# Allegro board MainBoard.brd
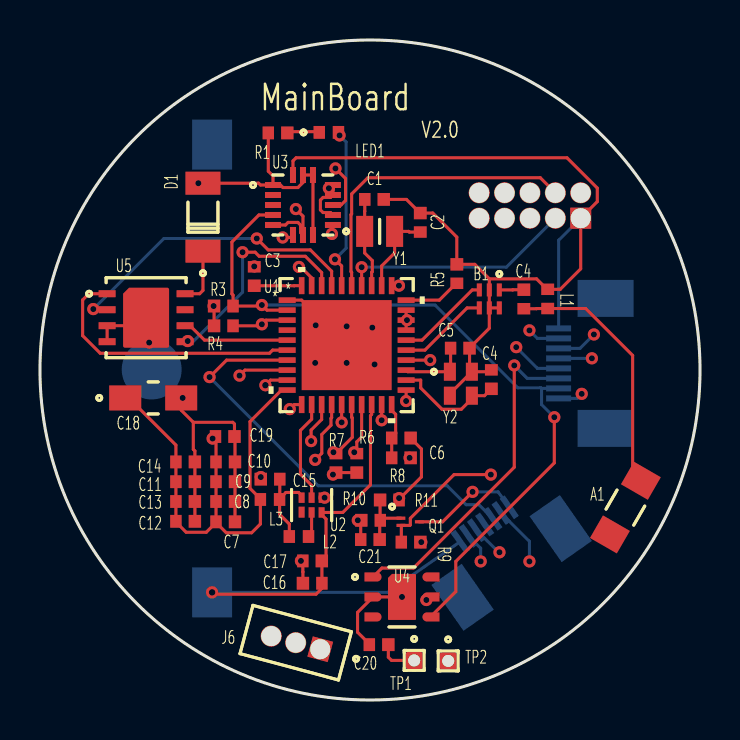
[diagram p0: board, top side]
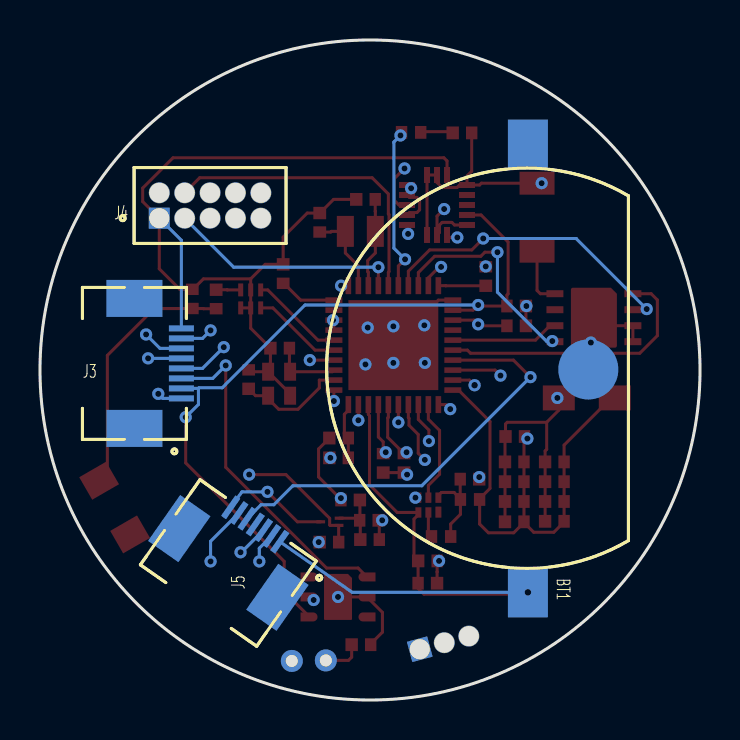
[diagram p1: board, bottom side, seen from below]

Outline 33.02 x 33.02 mm; copper layers: TOP, GND, SIGNAL1, SIGNAL2, POWER, BOTTOM. Coordinates in mm from the lower left corner of the outline.
Outline path: circle c16.51,16.51 r16.51

## Placement (name value [footprint] x y rotation side)
A1  AN_SMD  [ANSMD3216]  29.29 9.63 240 top
B1  Balun_LFB182G45BG2D280  [LFB182G45BG2D280]  22.48 20.07 270 top
BT1  -  [CR2032]  8.61 16.59 270 bottom
C1  22pF  [C0402]  16.74 25.04 0 top
C2  22pF  [C0402]  19.02 23.9 90 top
C3  1uF  [C0402]  10.72 21.18 270 top
C4  12pF  [C0402]  22.58 16.03 270 top
C4_GRM1555C1H1R2CZ01D1  1.2pF  [C0402]  24.21 20.07 90 top
C5  12pF  [C0402]  21.03 17.6 0 top
C6  1nF  [C0402]  18.08 13.11 0 top
C7  100nF  [C0402]  9.3 8.92 0 top
C8  100nF  [C0402]  9.3 9.93 0 top
C9  100nF  [C0402]  9.3 10.92 0 top
C10  100nF  [C0402]  9.3 11.91 0 top
C11  200pF  [C0402]  7.29 10.92 0 top
C12  2.2uF  [C0402]  7.29 8.94 0 top
C13  1uF  [C0402]  7.29 9.93 0 top
C14  100nF  [C0402]  7.29 11.91 0 top
C15  2.2uF  [C0402]  11.51 11.05 180 top
C16  1210  [C0402]  13.61 5.84 180 top
C17  2.2uF  [C0402]  13.64 6.96 0 top
C18  CAP POL  [3216-18]  5.66 15.11 0 top
C19  CAP NP  [C0402]  9.27 13.18 0 top
C20  10NF_25V_GRM155R71E103KA01D  [C0402]  16.97 2.77 0 top
C21  100pF  [C0402]  16.54 8.03 0 top
D1  1N60P_LL34  [LL60]  8.15 24.16 90 top
J3  SkinClosed_Ports  [FPC_8PIN_0_5MM]  28.3 16.84 0 bottom
J4  CC_Debugger  [HEADER_2X5_6]  27.05 24.1 180 bottom
J5  SIM800_Ports  [FPC_7PIN_0_5MM]  23.6 6.86 305 bottom
J6  UART  [HEADER1X3]  14.02 2.54 165 top
L1  ? nH  [L0402]  25.4 20.07 270 top
L2  2.2uH  [L0402]  12.95 8.18 180 top
L3  LBead_BLM15HG102SN1D  [L0402]  11.51 10.03 180 top
LED1  RED  [LED0402]  14.45 28.4 0 top
Q1  MMBT3904SL-SOT-923  [SOT923]  18.52 8.92 0 top
R1  330R  [R0402]  11.91 28.37 0 top
R3  2K2  [R0402]  9.17 19.71 180 top
R4  2K2  [R0402]  9.17 18.72 180 top
R5  56K-1%  [R0402]  20.85 21.34 90 top
R6  4.7K  [R0402]  15.85 11.84 270 top
R7  4.7K  [R0402]  14.81 11.84 270 top
R8  2K7  [R0402]  18.08 12.12 0 top
R9  20K  [R0402]  18.57 7.9 0 top
R10  4.7K  [R0402]  16.54 8.99 180 top
R11  47K  [R0402]  17.48 10.01 180 top
TP1  TP  [TP1]  18.72 1.98 0 top
TP2  TP  [TP1]  20.42 1.96 0 top
U1  CC2541-VQFN  [RHA40_4P5X4P5]  15.34 17.75 0 top
U2  TPS62730  [DRY6]  13.59 9.75 90 top
U3  -  [LIS3DH]  13.16 24.77 0 top
U4  -  [SHT25]  18.11 5.16 0 top
U5  MX25U1635EZUI-10G  [MX25U1635EZUI]  5.31 19.13 0 top
Y1  32.768KHz  [Y_FC_12M]  16.99 23.44 0 top
Y2  32MHz  [FA-118T]  21.06 15.82 0 top

## Library data of the parts
A1 = AN_SMD_1
B1 = Balun_LFB182G45BG2D280
BT1 = BATTERY
C1-C4 C4_GRM1555C1H1R2CZ01D1 C5-C14 C21 = CAP-NP
C15 C17 C19 C20 = CAP NP
C16 = CAP-POL
C18 = CAP POL
D1 = DIODE
J3 = HEADER 8
J4 = CC_Debugger
J5 = HEADER 7
J6 = HEADER 3
L1 L2 = L
L3 = BEAD
LED1 = LED
Q1 = NPN
R1 R3-R11 = R
TP1 TP2 = TP
U1 = CC2541
U2 = TPS62730
U3 = LIS3DH
U4 = SHT25_0
U5 = MX25U1635EZUI-10G_0
Y1 = Crystal_2PIN
Y2 = Crystal_4PIN_US

## Footprints (pads in the part's own frame, mm; a bottom-side part is the same pattern mirrored in y, then rotated)
3216-18
  rect 1.6x1.25 smd: 1(-1.4,0) 2(1.4,0)
ANSMD3216
  rect 1.3x1.55 smd: 1(-1.55,0) 2(1.55,0)
C0402
  rect 0.57x0.64 smd: 1(-0.49,0)
  rect 0.62x0.64 smd: 2(0.46,0)
CR2032
  rect 2.5x2 smd: (-11.2,0) 1(11.2,0)
  round 3 smd: 2(0.051,3.023)
DRY6
  rect 0.55x0.3 smd: 1(-0.355,0.5)
  rect 0.52x0.3 smd: 2(-0.37,0) 3(-0.37,-0.5) 4(0.37,-0.5) 5(0.37,0) 6(0.37,0.5)
FA-118T
  rect 0.6x0.9 smd: 1(-0.55,0.6) 2(-0.55,-0.6) 3(0.55,-0.6) 4(0.55,0.6)
FPC_7PIN_0_5MM
  rect 2.8x1.85 smd: (0,2.997) (0,-2.997)
  rect 1.25x0.3 smd: 1(-2.35,1.5) 2(-2.35,1) 3(-2.35,0.5) 4(-2.35,0) 5(-2.35,-0.5) 6(-2.35,-1) 7(-2.35,-1.5)
FPC_8PIN_0_5MM
  rect 2.8x1.85 smd: (0,-3.251) (0,3.251)
  rect 1.25x0.3 smd: 1(-2.35,1.75) 2(-2.35,1.25) 3(-2.35,0.75) 4(-2.35,0.25) 5(-2.35,-0.25) 6(-2.35,-0.75) 7(-2.35,-1.25) 8(-2.35,-1.75)
HEADER1X3
  rect 1.05x1.05 hole 1: 1(0,0)
  round 1.05 hole 1: 2(1.27,0) 3(2.54,0)
HEADER_2X5_6
  rect 1.05x1.05 hole 1: 1(0,0)
  round 1.05 hole 1: 2(0,1.27) 3(1.27,0) 4(1.27,1.27) 5(2.54,0) 6(2.54,1.27) 7(3.81,0) 8(3.81,1.27) 9(5.08,0) 10(5.08,1.27)
L0402
  rect 0.57x0.64 smd: 1(-0.48,0) 2(0.48,0)
LED0402
  rect 0.57x0.64 smd: 1(-0.48,0) 2(0.48,0)
LFB182G45BG2D280
  rect 0.65x0.25 smd: 1(-0.45,0.5) 2(-0.45,0) 3(-0.45,-0.5) 4(0.45,-0.5) 5(0.45,0) 6(0.45,0.5)
LIS3DH
  rect 0.8x0.3 smd: 1(-1.5,1) 2(-1.5,0.5) 3(-1.5,0) 4(-1.5,-0.5) 5(-1.5,-1) 9(1.5,-1) 10(1.5,-0.5) 11(1.5,0) 12(1.5,0.5) 13(1.5,1)
  rect 0.3x0.8 smd: 6(-0.5,-1.5) 7(0,-1.5) 8(0.5,-1.5) 14(0.5,1.5) 15(0,1.5) 16(-0.5,1.5)
LL60
  rect 1.15x1.75 smd: 1(1.7,0) 2(-1.7,0)
MX25U1635EZUI
  rect 0.85x0.35 smd: 1(-1.95,1.2) 2(-1.95,0.4) 3(-1.95,-0.4) 4(-1.95,-1.2) 5(1.95,-1.2) 6(1.95,-0.4) 7(1.95,0.4) 8(1.95,1.2)
  custom 2.3x3 smd: 9(0,0)
R0402
  rect 0.57x0.64 smd: 1(-0.49,0)
  rect 0.62x0.64 smd: 2(0.46,0)
RHA40_4P5X4P5
  rect 0.85x0.28 smd: 1(-2.975,2.25) 2(-2.975,1.75) 3(-2.975,1.25) 4(-2.975,0.75) 5(-2.975,0.25) 6(-2.975,-0.25) 7(-2.975,-0.75) 8(-2.975,-1.25) 9(-2.975,-1.75) 10(-2.975,-2.25) 21(2.975,-2.25) 22(2.975,-1.75) 23(2.975,-1.25) 24(2.975,-0.75) 25(2.975,-0.25) 26(2.975,0.25) 27(2.975,0.75) 28(2.975,1.25) 29(2.975,1.75) 30(2.975,2.25)
  rect 0.28x0.85 smd: 11(-2.25,-2.975) 12(-1.751,-2.975) 13(-1.25,-2.975) 14(-0.75,-2.975) 15(-0.25,-2.975) 16(0.25,-2.975) 17(0.75,-2.975) 18(1.25,-2.975) 19(1.751,-2.975) 20(2.25,-2.975) 31(2.25,2.975) 32(1.751,2.975) 33(1.25,2.975) 34(0.75,2.975) 35(0.25,2.975) 36(-0.25,2.975) 37(-0.75,2.975) 38(-1.25,2.975) 39(-1.751,2.975) 40(-2.25,2.975)
  rect 4.5x4.5 smd: 41(0,0)
SHT25
  custom 0.85x0.45 smd: 1(-1.45,1) 2(-1.45,0) 3(-1.45,-1) 4(1.45,-1) 5(1.45,0) 6(1.45,1)
  custom 1.4x2.3 smd: 7(0,0)
SOT923
  rect 0.44x0.16 smd: 1(0.46,0) 2(-0.46,0.18) 3(-0.46,-0.18)
TP1
  round 1.1 hole 0.6: 1(0,0)
Y_FC_12M
  rect 0.85x1.55 smd: 1(-0.75,0) 2(0.75,0)

## Nets
DGND: B1.2 B1.5 B1.6 BT1.2(-) C1.2 C2.2 C3.1 C4.1 C5.2 C6.2 C7.2 C8.2 C9.2 C10.2 C11.2 C12.2 C13.2 C14.2 C15.2 C16.2 C17.1 C18.2 C19.2 C20.1 J3.8 J4.1(GND) J5.7 J6.3 L1.1 Q1.1(EMITTER) R5.2 R11.1 TP2.1 U1.1(GND#1) U1.41(GND#41) U2.4(GND) U3.5(GND#5) U3.7(SDO/SA0) U3.10(RES) U3.12(GND#12) U3.13(ADC3) U3.16(ADC1) U4.2(GND) U4.7(DGND) U5.3(/WP) U5.4(GND) U5.9(DGND) Y2.2 Y2.4
BAT_ADC: BT1.1(+) C16.1 C17.2 J5.1 U1.18(P0_1) U2.3(VIN)
BPI_BUS: J5.6 U1.14(P0_5)
CC2541_RF_N: B1.3 U1.26(RF_N)
CC2541_RF_P: B1.4 U1.25(RF_P)
CC2541_SCL: J3.2 R3.1 U1.2(SCL) U3.4(SCL/SPE) U4.4(SCL)
CC2541_SDA: J3.3 R4.1 U1.3(SDA) U3.6(SDA) U4.1(SDA)
DC: J4.3(DC) U1.34(P2_2/DC)
DC_P0_7: U1.12(P0_7) U2.5(BYP)
DD: J4.4(DD) U1.35(P2_1/DD)
LIS3DH_INT1: U1.9(P1_1) U3.11(INT1)
LIS3DH_INT2: U1.8(P1_2) U3.9(INT2)
LTC_CS: J5.5 U1.7(P1_3)
MCP_EN: C21.1 R10.2 U1.15(P0_4)
MISO: U1.37(P1_7) U5.2(SO)
MOSI: U1.38(P1_6) U5.5(SI)
NRST: J4.7(NRST) R8.2
P0_0/AD0: J3.4 U1.19(P0_0)
P0_2/AD2: J5.3 J6.1 R6.1 U1.17(P0_2)
P0_3/AD3: J5.2 J6.2 R7.1 U1.16(P0_3)
P0_6/AD6: J3.7 U1.13(P0_6)
P1_0: J3.6 U1.11(P1_0)
P2_0: LED1.2(CATHODE) U1.36(P2_0)
REG_VDD: C7.1 C8.1 C9.1 C10.1 C11.1 C12.1 C13.1 C14.1 C18.1 C19.1 C20.2 D1.1(A) J3.1 J4.2(VCC) L3.2 R1.1 R3.2 R4.2 R6.2 R7.2 R9.2 TP1.1 U1.10(DVDD2) U1.21(AVDD5) U1.24(AVDD3) U1.27(AVDD2) U1.28(AVDD1) U1.29(AVDD4) U1.31(AVDD6) U1.39(DVDD1) U3.1(VDD_IO) U3.8(CS) U3.14(VDD) U3.15(ADC2) U4.5(VDD)
SCK: U1.5(P1_5) U5.6(SCLK)
SIM800_PK: J5.4
SSN: U1.6(P1_4) U5.1(/CS)
VMCP: J3.5 Q1.3(COLLECTOR) R9.1
N12835: C1.1 U1.33(P2_3/OSC32K_Q2) Y1.1
N12841: C2.1 U1.32(P2_4/OSC32K_Q1) Y1.2
N13149: R5.1 U1.30(RBIAS)
N13333: C3.2 U1.40(DCOUPL)
N14357: C5.1 U1.23(XOSC_Q2) Y2.1
N14367: C4.2 U1.22(XOSC_Q1) Y2.3
N19377: C6.1 R8.1 U1.20(RST_N)
N42338: B1.1 C4_GRM1555C1H1R2CZ01D1.2
N42343: A1.1(ANT) C4_GRM1555C1H1R2CZ01D1.1 L1.2
N157847: C15.1 L2.2 L3.1 U2.6(VOUT)
N158007: L2.1 U2.2(SW)
N177102: C21.2 Q1.2(BASE) R10.1 R11.2
N187935: D1.2(K) U5.8(VCC)
N188720: LED1.1(ANODE) R1.2

Pads without a net: A1 2; J4 5 6 8 9 10; U1 4; U2 1; U3 2 3; U4 3 6; U5 7

## Via types
v1: diameter 0.61, hole 0.305, TOP to BOTTOM, 62 vias
v2: diameter 0.61, hole 0.33, TOP to BOTTOM, 2 vias

## Routing (per net, layer and track width the routed paths; a pad name or vN(x,y) marks a point on that pad's centre or on a via; arc(x,y) is an arc through that point)
DGND: length 108.1
  TOP w0.152: B1.5 22.48,18.6 21.49,17.61 C5.2 21.49,16.54 Y2.4 ; B1.5 B1.2 22.48,21.07 ; B1.5 B1.6 ; 17.97,10.04 19.08,11.16 19.08,12.56 18.54,13.1 C6.2 ; 17.97,10.04 v1(17.97,10.1) ; 17.97,10.04 R11.1 ; 14.66,17.75 v1(13.77,16.87) ; 14.66,17.75 14.66,17.88 v1(13.79,18.75) ; 14.66,17.75 U1.41 ; U3.10 14.54,24.39 14.16,24.39 14.03,24.52 14.03,25.01 14.16,25.14 14.54,25.14 U3.12 U3.13 14.61,25.76 v1(14.45,25.6) ; C12.2 C13.2 C11.2 C14.2 7.75,12.46 7.67,12.54 7.67,13.89 ; v1(18.11,5.16) U4.2 15.89,4.38 15.89,3.39 16.48,2.8 C20.1 ; U1.41 15.85,17.75 ; U1.41 13.09,20 U1.1 ; U1.41 v1(15.34,18.69) ; U1.41 v1(15.34,16.87) ; 15.85,17.75 15.85,17.68 v1(16.74,16.79) ; 15.85,17.75 15.85,17.86 v1(16.62,18.63) ; 22.48,21.07 24.84,21.07 25.36,20.55 L1.1 26.02,20.55 27.05,21.57 J4.1 27.88,24.93 27.88,25.61 26.36,27.13 12.81,27.13 12.66,26.97 U3.16 ; 22.48,21.07 21.75,21.8 R5.2 20.85,23.16 19.65,24.36 C2.2 19.01,24.36 18.33,25.04 C1.2 ; v1(7.14,15.11) C18.2 7.06,14.5 7.67,13.89 ; Y2.2 20.51,15.32 Y2.4 ; U2.4 v1(14.24,10.12) ; U5.4 U5.3 4.91,18.73 U5.9 5.89,18.54 5.89,18.31 v1(5.46,17.88) ; 7.67,13.89 9.64,13.89 9.73,13.81 C19.2 9.76,13.16 C10.2 C9.2 C8.2 C7.2 ; Q1.1 20.14,8.92 v1(21.64,10.41) ; v1(12.8,24.56) 13.16,24.21 U3.7 13.04,23.39 13.04,23.76 12.9,23.89 12.41,23.89 12.28,23.77 U3.5 ; C4.1 22.49,16.42 Y2.4 ; v1(13.06,6.96) C17.1 13.15,6.41 13.15,6.41 C16.2 ; C3.1 v1(10.72,21.69) ; C15.2 v1(11.05,11.15)
  GND w0.152: 19.67,1.96 TP2.1 ; TP2.1 20.42,1.2 ; TP2.1 21.18,1.96 ; TP2.1 20.42,2.71 ; 10.79,3.2 J6.3 ; J6.3 11.57,3.98 ; J6.3 11.57,2.42 ; 27.83,24.1 J4.1 27.05,23.33
  BOTTOM w0.152: v1(21.64,10.41) 22.92,10.41 J5.7 ; BT1.2 5.46,16.66 v1(5.46,17.88) ; J4.1 25.95,23 J3.8
BAT_ADC: length 29.9
  TOP w0.152: v2(8.61,5.39) 8.7,5.29 13.81,5.29 14.1,5.59 C16.1 14.1,6.96 C17.2 14.1,6.97 14.31,7.18 14.31,9.05 14.09,9.27 U2.3 15.15,9.38 16.53,10.77 16.53,14.23 16.59,14.29 U1.18
  BOTTOM w0.152: v2(8.61,5.39) 17.4,5.39 J5.1
BPI_BUS: length 20.7
  TOP w0.152: v1(13.77,12.01) 14.1,12.34 14.1,13.28 14.56,13.75 14.56,14.09 14.59,14.13 U1.14
  SIGNAL2 w0.152: v1(24.49,6.93) 23.95,6.4 17.21,6.4 13.71,9.9 13.71,11.95 v1(13.77,12.01)
  BOTTOM w0.152: J5.6 24.49,7.94 v1(24.49,6.93)
CC2541_RF_N: length 4.7
  TOP w0.152: B1.3 21.63,20.52 19.11,18 U1.26
CC2541_RF_P: length 4.5
  TOP w0.152: B1.4 21.37,19.62 19.26,17.5 U1.25
CC2541_SCL: length 39.5
  TOP w0.152: v1(25.73,14.15) 25.73,11.86 20.8,6.93 20.8,5.43 19.56,4.18 U4.4 ; U1.2 11.36,19.5 v1(11.1,19.76) 11.05,19.71 R3.1 9.66,20.26 9.6,20.32 9.6,22.91 10.95,24.26 U3.4
  BOTTOM w0.152: 25.09,15.59 25.09,14.79 v1(25.73,14.15) ; 25.09,15.59 25.06,15.62 23.9,15.62 19.76,19.76 v1(11.1,19.76) ; 25.09,15.59 J3.2
CC2541_SDA: length 38.6
  TOP w0.152: U1.3 11.31,19 v1(11.1,18.8) 11.02,18.72 R4.1 ; v1(23.73,16.74) 23.73,11.65 18.68,6.6 17.11,6.6 U4.1 ; U3.6 12.53,23.14 v1(12.14,23.14)
  SIGNAL1 w0.152: v1(12.14,23.14) 12.14,19.84 v1(11.1,18.8) 12.34,17.55 22.91,17.55 v1(23.73,16.74)
  BOTTOM w0.152: v1(23.73,16.74) 24.38,16.09 J3.3
DC: length 11.6
  TOP w0.152: U1.34 v1(16.09,21.65)
  BOTTOM w0.152: J4.3 23.33,21.65 v1(16.09,21.65)
DC_P0_7: length 5.1
  TOP w0.152: U1.12 13.59,14.05 13.03,13.49 13.03,11.29 13.59,10.74 U2.5
DD: length 15.5
  TOP w0.152: J4.4 25.03,26.13 16.4,26.13 15.59,25.32 15.59,24.32 15.56,24.28 15.56,21.43 15.59,21.4 U1.35
LIS3DH_INT1: length 16.4
  TOP w0.152: U1.9 11.53,16 v2(11.28,15.75) ; U3.11 15.06,24.77 15.29,24.99 15.29,26.09 v1(14.78,26.59)
  SIGNAL2 w0.152: v2(11.28,15.75) 11.28,17.81 15.29,21.82 15.29,26.09 v1(14.78,26.59)
LIS3DH_INT2: length 12.4
  TOP w0.152: U3.9 14.61,23.71 v1(14.61,23.32) ; U1.8 10.26,16.5 v1(9.98,16.23)
  SIGNAL2 w0.152: v1(14.61,23.32) 13.85,23.32 9.98,19.45 v1(9.98,16.23)
LTC_CS: length 21.3
  TOP w0.152: U1.7 9.33,17 v1(8.48,16.15)
  BOTTOM w0.152: J5.5 21.96,9.77 21.32,9.77 20.37,10.72 13.92,10.72 v1(8.48,16.15)
MCP_EN: length 7.4
  TOP w0.152: C21.1 16.05,8.96 R10.2 ; U1.15 v1(15.09,13.89)
  SIGNAL1 w0.152: v1(15.09,13.89) 16.26,12.73 16.26,9.35 v1(15.9,8.99)
MISO: length 15.5
  TOP w0.152: U1.37 14.59,21.45 13.53,22.52 11.42,22.52 v1(10.85,23.09) ; U5.2 3.33,19.56 v1(2.67,19.56)
  BOTTOM w0.152: v1(10.85,23.09) 6.2,23.09 v1(2.67,19.56)
MOSI: length 10.8
  TOP w0.152: U1.38 14.09,21.38 13.28,22.2 10.97,22.2 10.76,22.4 v1(10.13,22.4)
  BOTTOM w0.152: v1(7.39,17.96) 7.69,17.96 10.13,20.4 v1(10.13,22.4)
NRST: length 16.3
  TOP w0.152: R8.2 v1(18.49,12.12)
  SIGNAL2 w0.152: J4.7 25.02,22.33 25.02,17.28 19.86,12.12 v1(18.49,12.12)
P0_0/AD0: length 11.6
  TOP w0.152: U1.19 v1(17.09,14)
  SIGNAL2 w0.152: v1(17.09,14) 20.17,14 v1(23.83,17.65)
  BOTTOM w0.152: J3.4 24.89,16.59 v1(23.83,17.65)
P0_2/AD2: length 24.8
  TOP w0.152: U1.17 16.09,13.16 15.85,12.92 R6.1 15.79,12.33 v1(15.72,12.4)
  SIGNAL1 w0.152: J6.1 14.5,3.02 18.89,3.02 22.99,7.12 v1(22.99,7.39)
  SIGNAL2 w0.152: v1(15.72,12.4) 16.89,11.23 19.15,11.23 v1(22.99,7.39)
  BOTTOM w0.152: 21.84,8.5 22.94,7.39 v1(22.99,7.39)
P0_3/AD3: length 25.1
  TOP w0.152: U1.16 15.59,14.14 15.62,14.11 15.62,13.14 R7.1 14.75,12.33 v1(14.68,12.4)
  SIGNAL1 w0.152: J6.2 16.86,6.93 v1(22.05,6.93)
  SIGNAL2 w0.152: v1(14.68,12.4) 17.83,9.25 19.74,9.25 v1(22.05,6.93)
  BOTTOM w0.152: v1(22.05,6.93) 22.05,7.59 J5.2
P0_6/AD6: length 17
  TOP w0.152: U1.13 14.09,14.03 13.56,13.51 v1(13.56,12.95)
  SIGNAL2 w0.152: v1(24.49,18.49) 20.25,18.49 18.99,17.23 18.99,17.03 14.91,12.95 v1(13.56,12.95)
  BOTTOM w0.152: v1(24.49,18.49) 24.89,18.09 J3.7
P1_0: length 19.5
  TOP w0.152: v1(12.5,14.55) 12.72,14.78 U1.11
  SIGNAL1 w0.152: v1(12.5,14.55) 13.67,15.72 25.15,15.72 v1(27.71,18.29)
  BOTTOM w0.152: v1(27.71,18.29) 27.01,17.59 J3.6
P2_0: length 8
  TOP w0.152: U1.36 15.09,21.71 v1(14.76,22.05)
  BOTTOM w0.152: v1(14.76,22.05) 15.32,22.61 15.32,27.91 v1(14.99,28.24)
REG_VDD: length 51.6
  TOP w0.152: v1(8.69,19.71) R3.2 R4.2 ; U1.39 13.59,21.12 13.04,21.67 v1(12.95,21.67) ; C20.2 17.43,2.14 17.59,1.98 TP1.1 ; R6.2 R7.2 14.75,11.38 v1(14.66,11.28) ; v1(7.92,25.86) D1.1 10.94,25.86 11.03,25.76 U3.1 ; U1.28 U1.27 ; U1.28 v1(18.36,19) ; U1.28 U1.29 ; 8.81,8.88 9.32,8.37 10.59,8.37 11.03,8.81 L3.2 11.03,10.07 10.51,10.59 10.51,13.93 12.08,15.5 U1.10 ; 8.81,8.88 C7.1 C8.1 C9.1 C10.1 8.81,13.16 C19.1 8.74,13.18 v1(8.64,13.08) ; 8.81,8.88 8.32,8.39 7.31,8.39 6.8,8.91 C12.1 C13.1 C11.1 C14.1 6.8,12.75 4.44,15.11 C18.1 ; U4.5 19.48,5.16 v1(19.33,5) ; U1.21 v1(18.32,14.96) ; U1.31 v1(17.96,20.73) ; U3.1 12.03,25.76 12.16,25.64 12.9,25.64 13.16,25.89 U3.15 U3.14 U3.8 ; U3.1 11.66,26.22 11.42,26.45 R1.1 ; U1.24 v1(19.52,17) ; R9.2 v1(19.08,7.9)
  POWER w0.152: TP1.1 19.47,1.98 ; TP1.1 17.97,1.98 ; TP1.1 18.72,2.74 ; TP1.1 18.72,1.23 ; 27.83,25.37 J4.2 27.05,26.15
  BOTTOM w0.152: v1(27.1,15.32) 26.88,15.09 J3.1
SCK: length 5.4
  TOP w0.152: U5.6 7.51,18.73 8.23,18 U1.5
SSN: length 13.8
  TOP w0.152: U5.1 2.44,20.33 2.13,20.02 2.13,18.23 3.01,17.35 11.48,17.35 11.64,17.5 U1.6
VMCP: length 16.9
  TOP w0.152: R9.1 18.08,8.71 Q1.3 18.5,8.74 18.53,8.76 18.53,9.09 20.72,11.28 v1(22.56,11.28)
  SIGNAL2 w0.152: v1(27.61,17.09) 27.64,17.07 27.64,15.1 23.82,11.28 v1(22.56,11.28)
  BOTTOM w0.152: J3.5 27.61,17.09 v1(27.61,17.09)
N12835: length 4.5
  TOP w0.152: U1.33 16.59,21.4 16.63,21.43 16.63,21.98 16.24,22.36 Y1.1 16.24,24.45 16.25,24.45 C1.1
N12841: length 4.3
  TOP w0.152: U1.32 17.09,21.71 17.74,22.36 Y1.2 18.44,23.44 18.48,23.41 C2.1
N13149: length 2.9
  TOP w0.152: U1.30 19.98,20 20.82,20.85 R5.1
N13333: length 2.4
  TOP w0.152: U1.40 12.72,20.73 12.72,20.72 C3.2
N14357: length 3.4
  TOP w0.152: C5.1 20.54,16.46 Y2.1 18.4,16.42 U1.23
N14367: length 5.6
  TOP w0.152: C4.2 22.24,15.22 Y2.3 21.61,15.07 21.08,14.55 20.11,14.55 19.05,15.61 19.05,16 U1.22
N19377: length 2.8
  TOP w0.152: U1.20 17.59,14.49 17.79,14.29 17.79,13.34 17.59,13.14 C6.1 R8.1
N42338: length 1.2
  TOP w0.152: B1.1 23.65,20.52 23.66,20.53 C4_GRM1555C1H1R2CZ01D1.2
N42343: length 12.9
  TOP w0.152: C4_GRM1555C1H1R2CZ01D1.1 24.84,19.58 24.85,19.59 L1.2 27.3,19.59 29.65,17.24 29.65,11.34 A1.1
N157847: length 4.5
  TOP w0.152: U2.6 13.09,10.23 12.94,10.38 12.3,10.38 11.99,10.07 L3.1 ; L3.1 12,10.04 C15.1 ; L3.1 11.99,9.29 12.47,8.8 L2.2
N158007: length 1.3
  TOP w0.152: U2.2 13.59,8.33 L2.1
N177102: length 3.1
  TOP w0.152: C21.2 17,8.96 R10.1 ; R10.1 17.13,9.1 Q1.2 ; R10.1 17.02,9 R11.2
N187935: length 2.9
  TOP w0.152: D1.2 8.15,20.49 7.99,20.33 U5.8
N188720: length 1.7
  TOP w0.152: R1.2 12.37,28.38 12.42,28.43 13.97,28.43 LED1.1

## Copper pours and planes (outline as drawn; the poured copper is in the pictures)
DGND on GND: 16.51,0.53 16.51,32.49
REG_VDD on POWER: 16.51,0.53 16.51,32.49

## Text on the board
Ref Des/Silkscreen Top: V2.0 | MainBoard
PLACE_BOUND_TOP: FIGURE | SIZE | 12.0 | 13.0 | 23.62 | 39.37 | DRILL CHART: TOP to BOTTOM | ALL UNITS ARE IN MILS | PLATED | QTY | 62 | 2 | 13
